# Altium PCB PWR.PcbDoc
Units mm, origin at the board's own origin, x right, y up, seen from the top; angles counter-clockwise.
Board outline 96 x 90 mm, 2 copper layers (Signal, GND); 41 components, 25 nets, 171 pads, 38 vias.
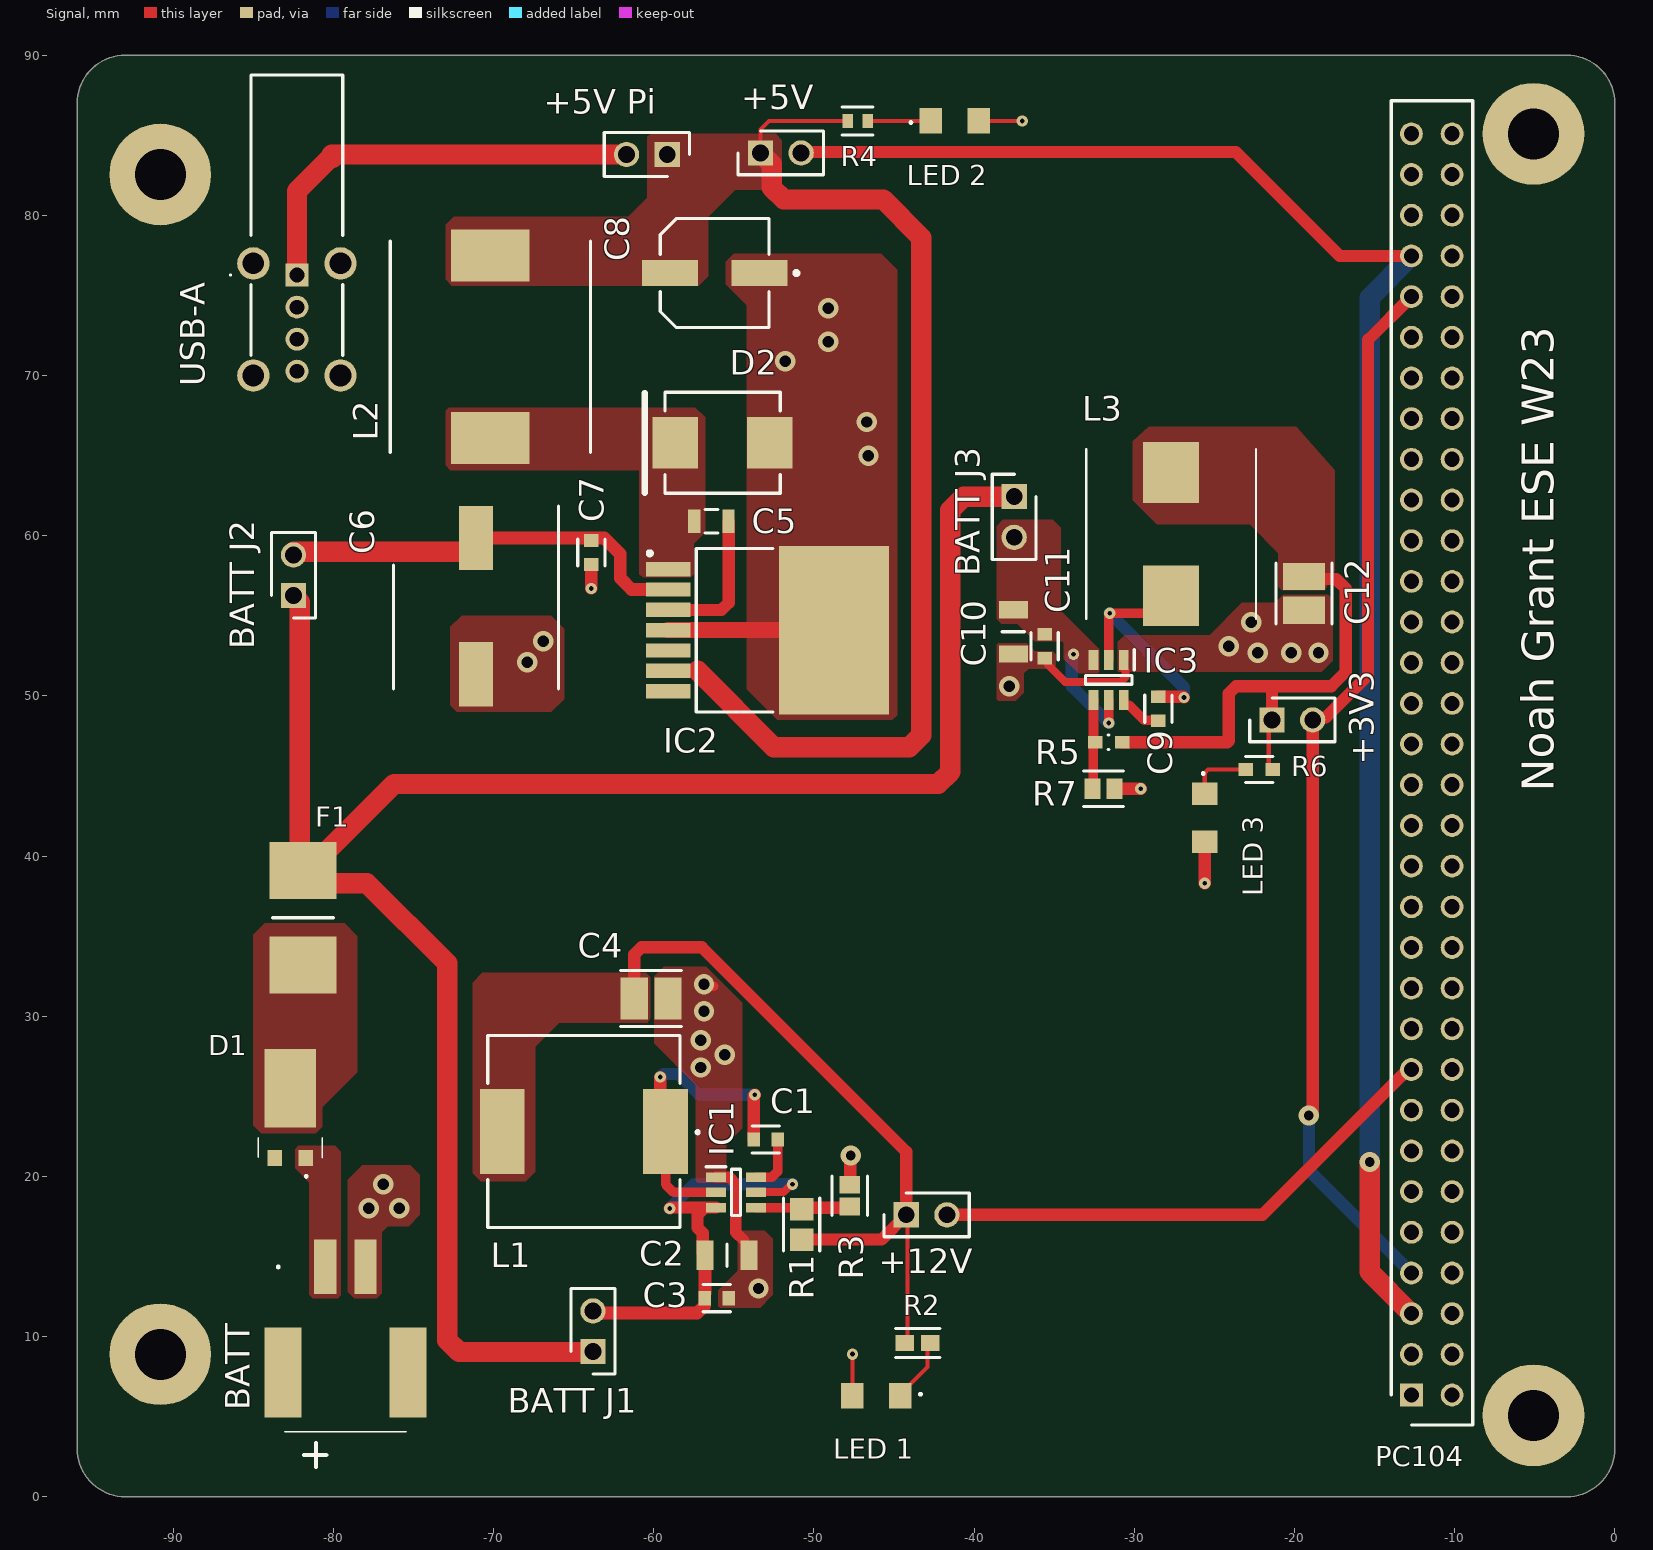
[diagram p0: Signal view]
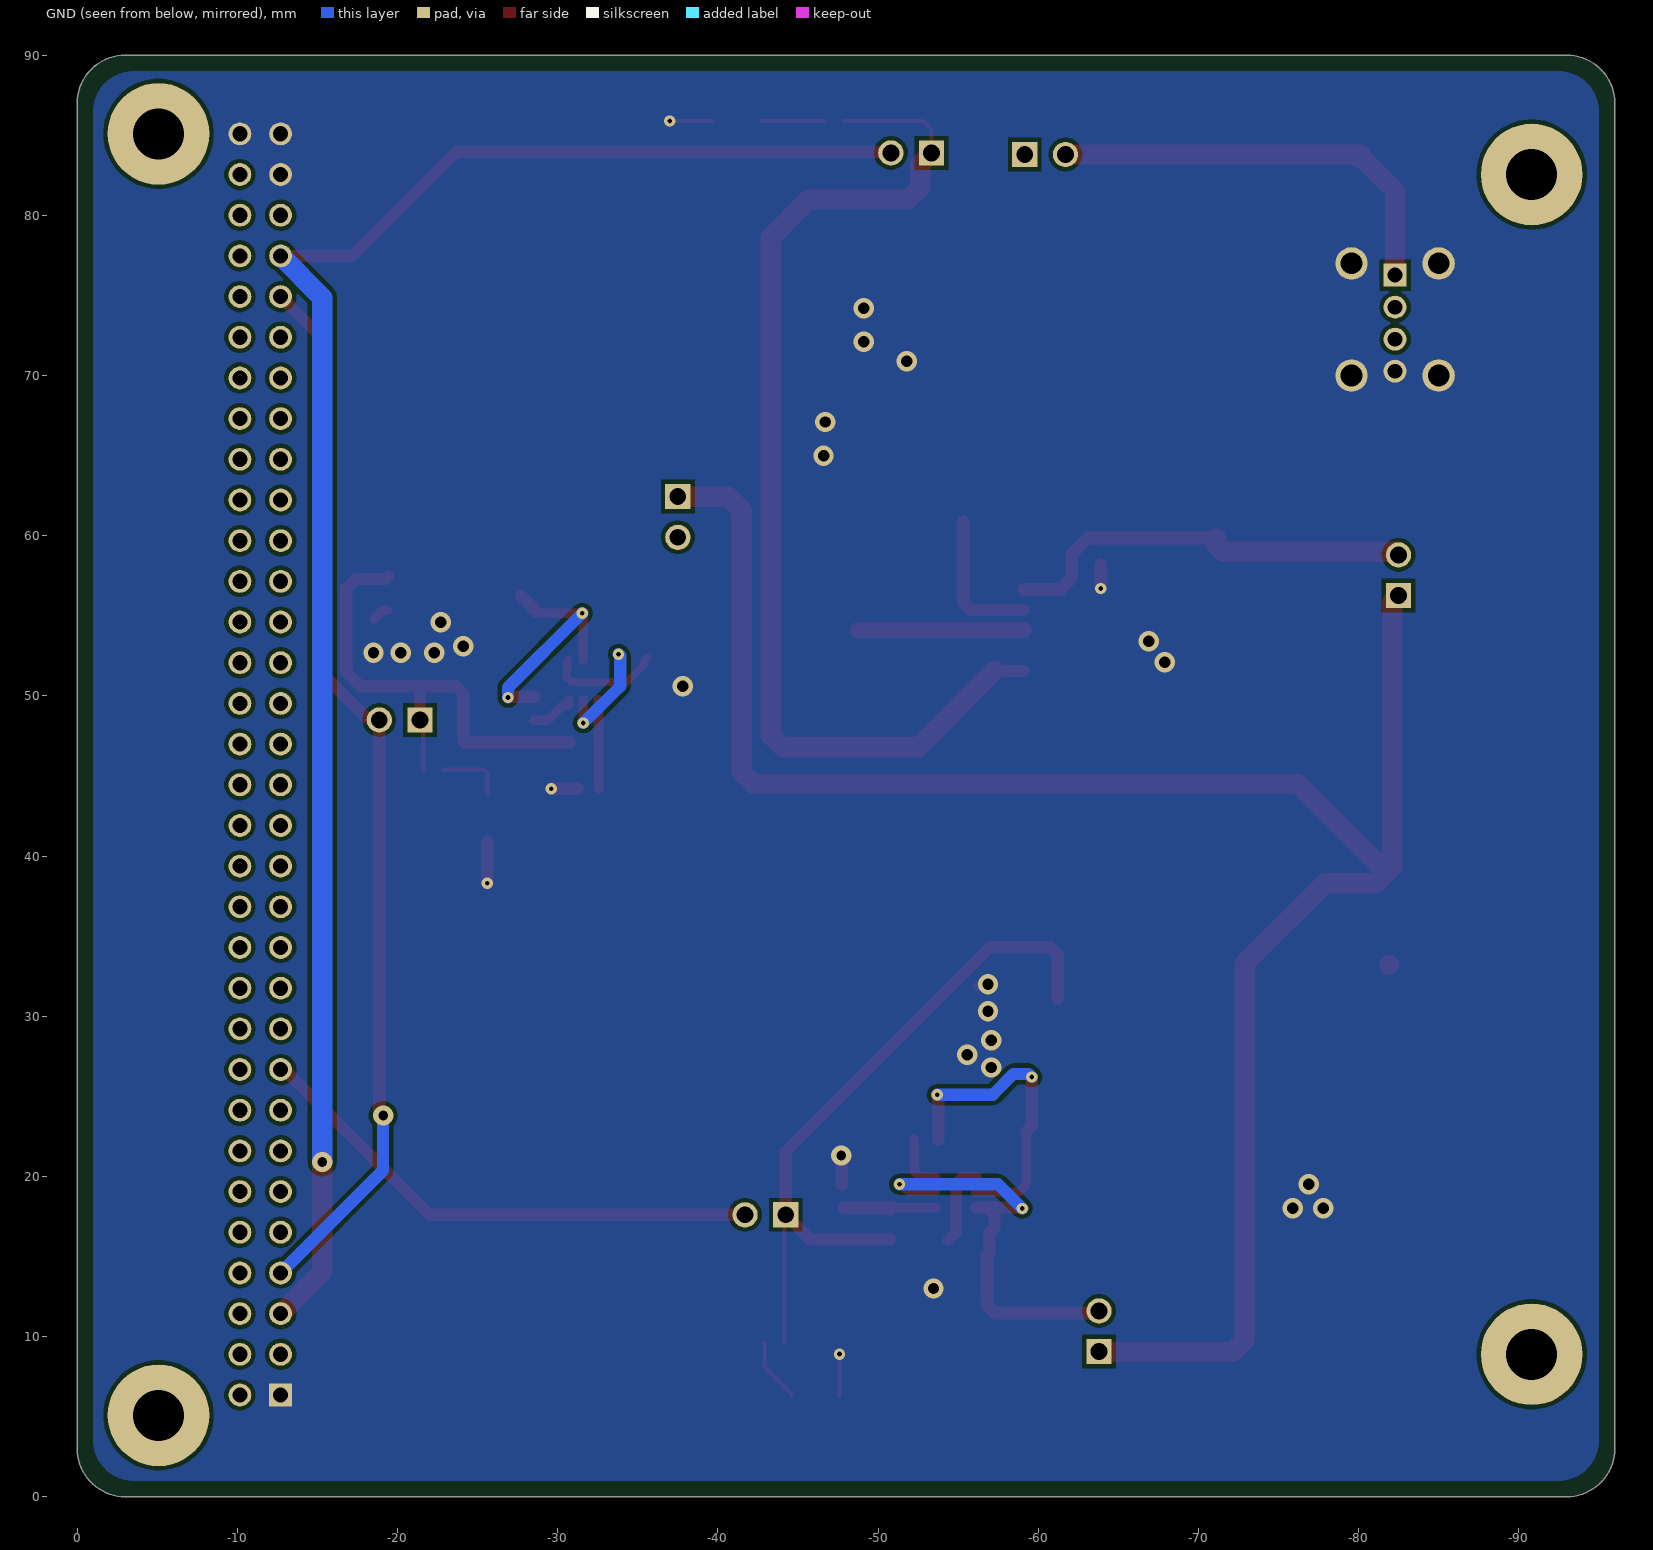
[diagram p1: GND view, seen from below]
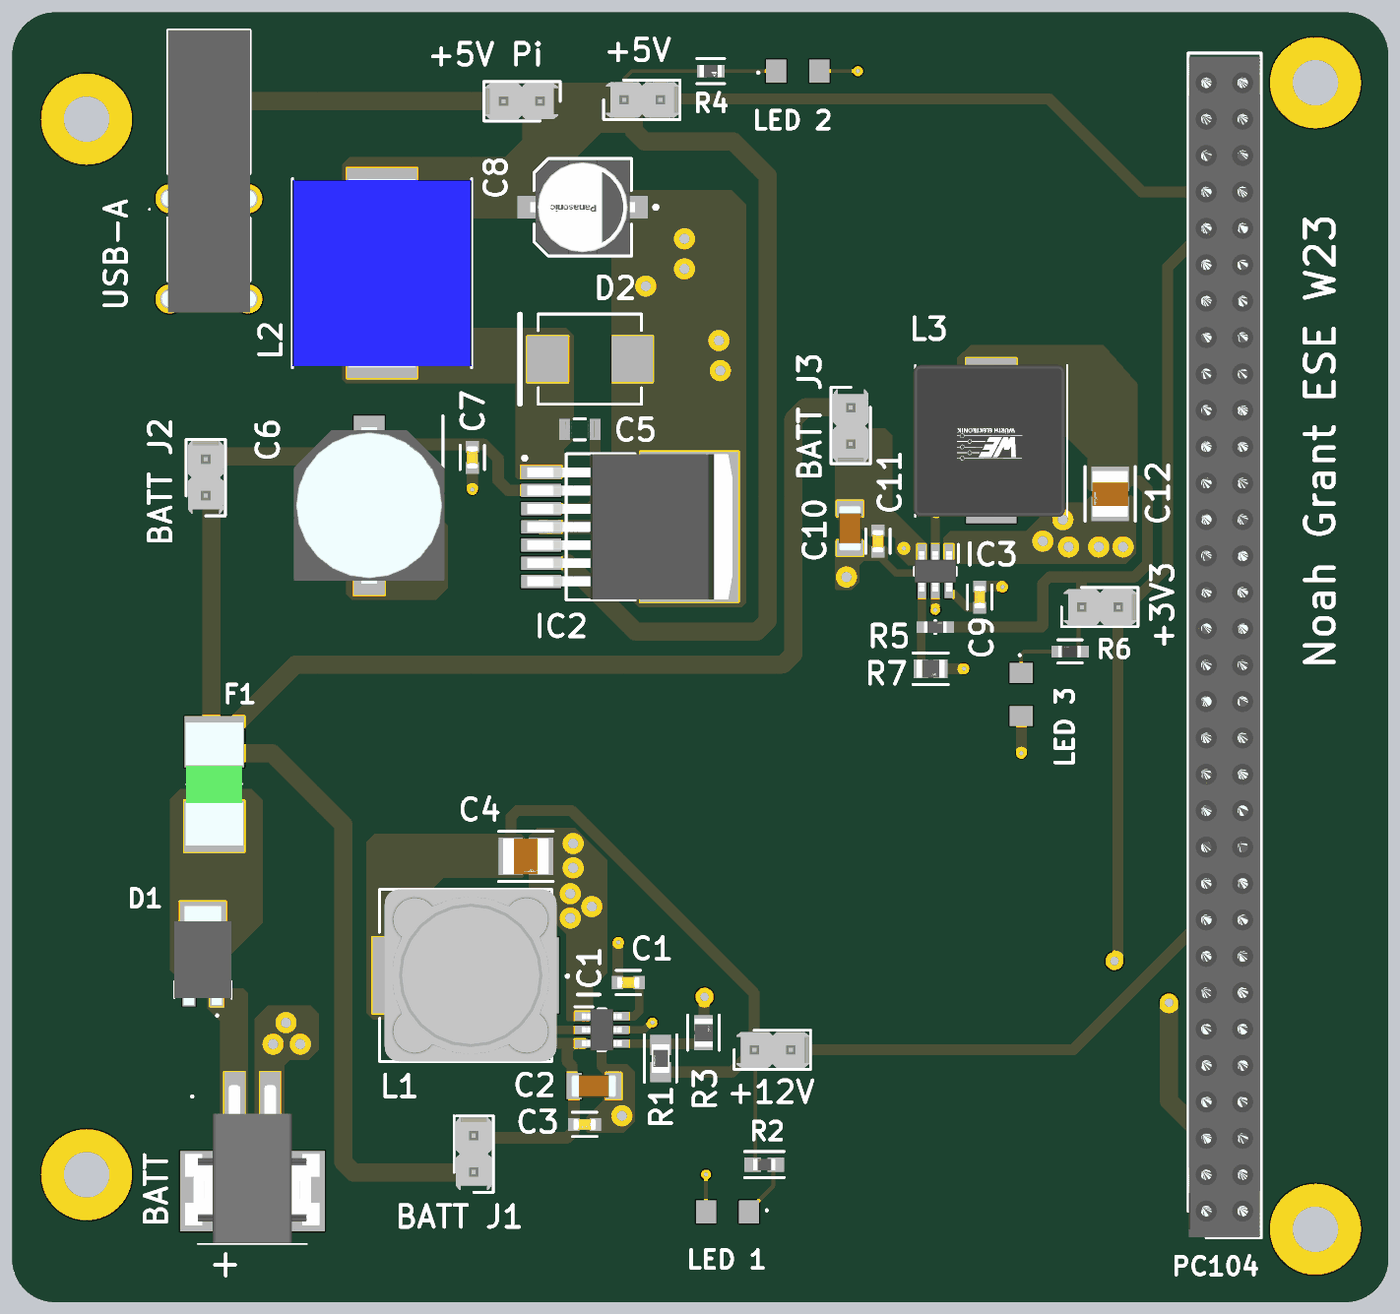
[diagram p2: 3D render of the assembled board from above, using the file's embedded part models]

## Layer stack, top to bottom
Top Solder: solder mask 0.0102, Solder Resist, Dk 3.5
Signal: signal copper 0.035
Dielectric 1: dielectric 0.32, FR-4, Dk 4.8
GND: signal copper 0.035
Bottom Solder: solder mask 0.0102, Solder Resist, Dk 3.5

## Board outline
-93,0 cw(c-93,3) -96,3 -96,87 cw(c-93,87) -93,90 -3,90 cw(c-3,87) 0,87 0,3 cw(c-3,3) -3,0

## Design rules (kind name [scope] priority, off if disabled: settings)
Clearance [All] p1: gap=0.254 ignorepadtopadclearanceinfootprint=FALSE except(0: Arc-Hole Track-Hole SMDPad-Hole THPad-Hole Via-Hole Fill-Hole Poly-Hole Region-Hole Text-Hole)
PolygonConnect [All] p1: connectstyle=Direct reliefconductorwidth=0.254 reliefentries=4 polygonreliefangle="90 Angle" airgapwidth=0.254
RoutingVias [All] p1: holewidth=0.3 width=0.7 viastyle="Through Hole" minholewidth=0.2 minwidth=0.5 maxholewidth=0.6 maxwidth=1.27
SolderMaskExpansion [All] p1: expansion=0.102 istentingtop=FALSE
Width [All] p1: maxlimit=2.79 minlimit=0.254 preferedwidth=0.762 minimp=50.000000 maximp=50.000000 favimp=50.000000
30 further rules are at their usual default settings.

## Classes and differential pairs
component class R-Pi3: USB-A
component class PC104_Connectors: PC104
component class Power: +3V3 +5V "+5V Pi" +12V BATT "BATT J1" "BATT J2" "BATT J3" C1 C2 C3 C4 C5 C6 C7 C8 C9 C10 C11 C12 D2 F1 IC1 IC2 IC3 L1 L2 L3 "LED 1" "LED 2" "LED 3" R1 R2 R3 R4 R5 R6 R7

## Components (designator, comment, footprint, x,y, rotation, side; value= is the part's Value field where it differs from the comment)
+3V3 "0022284023" HDRV2W87P0X254_1X2_508X249X863P -21.4,48.5 r0 top
+5V "0022284023" HDRV2W87P0X254_1X2_508X249X863P -53.34,83.9 r0 top
"+5V Pi" "0022284023" HDRV2W87P0X254_1X2_508X249X863P -59.16,83.8 r180 top
+12V "0022284023" HDRV2W87P0X254_1X2_508X249X863P -44.24,17.6 r0 top
BATT "1702473" 1702473 -79.25,14.35 r0 top
"BATT J1" "0022284023" HDRV2W87P0X254_1X2_508X249X863P -63.8,9.06 r90 top
"BATT J2" "0022284023" HDRV2W87P0X254_1X2_508X249X863P -82.5,56.26 r90 top
"BATT J3" "0022284023" HDRV2W87P0X254_1X2_508X249X863P -37.5,62.44 r270 top
C1 "CC0603KPX7R9BB104" FP-CC0603-DA-MFG -53.015,22.3 r0 top value="100 nF"
C2 "GRM31CR61H225KA88L" CAPC3216X180N -55.425,15.076 r180 top
C3 "CC0603KPX7R9BB104" FP-CC0603-DA-MFG -56.065,12.4 r0 top value="100 nF"
C4 "GRM32ER61C476KE15L" FP-GRM32E-0_3-0_2-IPC_C -60.165,31.1 r0 top
C5 "CGA4C2C0G1H103J060AA" FP-CGA4J-IPC_B -56.4,60.9 r180 top
C6 "50PFV100M10X10.5" CAPAE1030X1050N -71.1,55.6 r270 top
C7 "CC0603KPX7R9BB104" FP-CC0603-DA-MFG -63.9,58.95 r270 top value="100 nF"
C8 "16SVPF180M" FP-OS-CON-SMT-C6-MFG -56.2,76.4 r180 top
C9 "CC0603KPX7R9BB104" FP-CC0603-DA-MFG -28.5,49.2 r270 top value="100 nF"
C10 "GRM31CR61H225KA88L" CAPC3216X180N -37.55,54 r90 top
C11 "CC0603KPX7R9BB104" FP-CC0603-DA-MFG -35.6,53.1 r270 top value="100 nF"
C12 "GRM32ER61C476KE15L" FP-GRM32E-0_3-0_2-IPC_C -19.4,56.4 r270 top
D1 "DST1040S" DST1040SA -82.7,21.15 r270 top
D2 "B560C-13-F" DIOD-B5X0C-2_M -55.7,65.8 r0 top
F1 "TR2_6125FF5-R" FUSC8640X287N -81.9,36.15 r270 top
IC1 "LMR51420XDDCR" SOT95P280X110-6N -54.865,19 r0 top
IC2 "LM2677SX-5.0/NOPB" TO127P1435X464-8N -52.9,54.1 r0 top
IC3 "LMR51420XDDCR" SOT95P280X110-6N -31.6,51 r270 top
L1 "SRR1210-180M" SRR1210 -64.365,22.8 r90 top
L2 "MPX1D1250L220" INDPM132125X500N -70.2,71.8 r270 top
L3 "744325780" WE-HCI_103023 -27.7,60.1 r90 top
"LED 1" "APL3015EC-F01" APL3015ECF01 -46.1,6.3 r180 top
"LED 2" "APL3015EC-F01" APL3015ECF01 -41.2,85.9 r0 top
"LED 3" "APL3015EC-F01" APL3015ECF01 -25.6,42.4 r270 top
PC104 "10153302-32111LF" RHDR64W74P254_2X32_8238X499X1115P -12.7,6.35 r90 top locked
R1 "ERA-6AEB4223V" FP-ERA6A-IPC_A -50.765,17 r270 top
R2 "500R" FP-TFCR0603-IPC_A -43.529,9.6 r0 top
R3 "RNCP0805FTD22K1" FP-RNCP0805-IPC_C#1 -47.765,18.8 r270 top
R4 "150R" FP-MCT0603-IPC_C -47.271,85.9 r0 top
R5 "RC0603FR-07100KL" FP-RC0603-0_55-MFG -31.6,47.1 r0 top
R6 "75R" FP-RT0603-MFG -22.2,45.4 r180 top value=75Ω
R7 "RNCP0805FTD22K1" FP-RNCP0805-IPC_C#2 -31.924,44.2 r180 top
USB-A "73725-11A0RLF" 7372511A0RLF -82.28,76.27 r180 top

## Footprints (in the part's own frame and the unit in brackets; to place one, negate y for a bottom-side part, rotate by r counter-clockwise, add the part's x,y. Pads: shape width x height; smd on the part's side, far side on the other; paste and mask are expansions set on the pad)
1702473 [mm]
  rect 1.4x3.4 smd: 1(-1.25,0) 2(1.25,0)
  rect 2.3x5.6 smd: 3(-3.9,-6.6) 4(3.9,-6.6)
  silkscreen extent -4.25,-10.3 3.8,0.05, body extent -4.7,-10.21 4.7,0.79, height 5.12
7372511A0RLF [mm]
  rect 1.431x1.431 hole 0.92: 1(0,0)
  round 1.431 hole 0.92: 2(0,2) 3(0,4) 4(0,6)
  round 2.025 hole 1.35: MH1(2.72,-0.73) MH2(2.72,6.27) MH3(-2.72,6.27) MH4(-2.72,-0.73)
  silkscreen extent -2.86,-12.49 4.2,5, body extent -3.29,-12.49 3.29,7.21, height 15.93
APL3015ECF01 [mm]
  rect 1.4x1.6 smd: 1(-1.5,0) 2(1.5,0)
  silkscreen extent -2.8,-0.15 -2.7,-0.05
CAPAE1030X1050N [mm]
  rect 4x2.15 smd: 1(-4.25,0) 2(4.25,0)
  silkscreen extent -6.25,-5.15 5.15,5.15, body extent -5.45,-5.25 5.45,5.25, height 10.5
CAPC3216X180N [mm]
  rect 1.07x1.82 smd: 1(-1.38,0) 2(1.38,0)
  silkscreen extent 0,-0.7 0,0.7, body extent -1.6,-0.8 1.6,0.8, height 1.8
DIOD-B5X0C-2_M [mm] "Molded Diode, 2-Leads, Body 7.11x6.22mm, IPC Low Density"
  rect 2.85x3.2 smd: 1(-2.95,0) 2(2.95,0)
  silkscreen extent -4.87,-3.15 3.6,3.15, body extent -3.56,-3.11 3.55,3.11, height 2.63
DST1040SA [mm]
  rect 1x0.9 smd: 1(0,0.97) 2(0,-0.97)
  rect 4.9x3.2 smd: 3(-4.35,0)
  silkscreen extent -1.25,-2 1.2,2, body extent -6.48,-1.99 0.41,1.99, height 1.35
FP-CC0603-DA-MFG [mm]
  rect 0.8x0.9 smd paste+0 mask+0: 1(-0.75,0) 2(0.75,0)
  silkscreen extent -0.85,-0.85 0.85,0.85, body extent -1.35,-0.75 1.35,0.75, height 0.25
FP-CGA4J-IPC_B [mm]
  rect 0.756x1.456 smd paste+0 mask+0: 1(-1.075,0) 2(1.075,0)
  silkscreen extent -0.4,-0.73 0.4,0.73, body extent -1.7,-0.98 1.7,0.98, height 0.25
FP-ERA6A-IPC_A [mm]
  rect 1.405x1.462 smd paste+0 mask+0: 1(-0.951,0) 2(0.951,0)
  silkscreen extent -1.65,-1.13 1.65,1.13, body extent -2.15,-1.23 2.15,1.23, height 0.25
FP-GRM32E-0_3-0_2-IPC_C [mm]
  rect 1.703x2.606 smd paste+0 mask+0: 1(-1.051,0) 2(1.051,0)
  silkscreen extent -1.9,-1.75 1.9,1.75, body extent -2,-1.45 2,1.45, height 0.25
FP-MCT0603-IPC_C [mm]
  rect 0.664x0.862 smd paste+0 mask+0: 1(-0.629,0) 2(0.629,0)
  silkscreen extent -0.96,-0.87 0.96,0.87, body extent -1.06,-0.58 1.06,0.58, height 0.25
FP-OS-CON-SMT-C6-MFG [mm]
  rect 3.5x1.6 smd paste+0 mask+0: 1(-2.8,0) 2(2.8,0)
  silkscreen extent -5.23,-3.4 3.4,3.4, body extent -4.8,-3.65 4.8,3.65, height 0.25
FP-RC0603-0_55-MFG [mm]
  rect 0.9x0.8 smd paste+0 mask+0: 1(-0.85,0) 2(0.85,0)
  silkscreen extent -0.03,-0.45 0.03,0.45, body extent -1.4,-0.55 1.4,0.55, height 0.25
FP-RNCP0805-IPC_C#1 [mm]
  rect 1.105x1.308 smd paste+0 mask+0: 1(-0.676,0) 2(0.676,0)
  silkscreen extent -1.23,-1.1 1.23,1.1, body extent -1.33,-0.8 1.33,0.8, height 0.25
FP-RNCP0805-IPC_C#2 [mm]
  rect 1x1.308 smd paste+0 mask+0: 1(-0.676,0) 2(0.676,0)
  silkscreen extent -1.23,-1.1 1.23,1.1, body extent -1.33,-0.8 1.33,0.8, height 0.25
FP-RT0603-MFG [mm]
  rect 0.9x0.8 smd paste+0 mask+0: 1(-0.85,0) 2(0.85,0)
  silkscreen extent -0.85,-0.81 0.86,0.8, body extent -1.4,-0.55 1.4,0.55, height 0.25
FP-TFCR0603-IPC_A [mm]
  rect 1.158x1.012 smd paste+0 mask+0: 1(-0.802,0) 2(0.802,0)
  silkscreen extent -1.38,-0.91 1.38,0.91, body extent -1.88,-1.01 1.88,1.01, height 0.25
FUSC8640X287N [mm]
  rect 3.57x4.17 smd: 1(-2.95,0) 2(2.95,0)
  silkscreen extent 0,-1.9 0,1.9, body extent -4.3,-2 4.3,2, height 2.87
HDRV2W87P0X254_1X2_508X249X863P [mm]
  rect 1.575x1.575 hole 1.05: 1(0,0)
  round 1.575 hole 1.05: 2(2.54,0)
  silkscreen extent -1.4,-1.37 3.94,1.37, body extent -1.25,-1.24 3.83,1.24, height 8.37
INDPM132125X500N [mm]
  rect 3.25x4.9 smd: 1(-5.7,0) 2(5.7,0)
  silkscreen extent -6.6,-6.25 6.6,6.25, body extent -6.6,-6.25 6.6,6.25, height 5
RHDR64W74P254_2X32_8238X499X1115P [mm]
  rect 1.425x1.425 hole 0.95: 1(0,0)
  round 1.425 hole 0.95: 2(2.54,0) 3(5.08,0) 4(7.62,0) 5(10.16,0) 6(12.7,0) 7(15.24,0) 8(17.78,0) 9(20.32,0) 10(22.86,0) 11(25.4,0) 12(27.94,0) 13(30.48,0) 14(33.02,0) 15(35.56,0) 16(38.1,0) 17(40.64,0) 18(43.18,0) 19(45.72,0) 20(48.26,0) 21(50.8,0) 22(53.34,0) 23(55.88,0) 24(58.42,0) 25(60.96,0) 26(63.5,0) 27(66.04,0) 28(68.58,0) 29(71.12,0) 30(73.66,0) 31(76.2,0) 32(78.74,0) 33(0,-2.54) 34(2.54,-2.54) 35(5.08,-2.54) 36(7.62,-2.54) 37(10.16,-2.54) 38(12.7,-2.54) 39(15.24,-2.54) 40(17.78,-2.54) 41(20.32,-2.54) 42(22.86,-2.54) 43(25.4,-2.54) 44(27.94,-2.54) 45(30.48,-2.54) 46(33.02,-2.54) 47(35.56,-2.54) 48(38.1,-2.54) 49(40.64,-2.54) 50(43.18,-2.54) 51(45.72,-2.54) 52(48.26,-2.54) 53(50.8,-2.54) 54(53.34,-2.54) 55(55.88,-2.54) 56(58.42,-2.54) 57(60.96,-2.54) 58(63.5,-2.54) 59(66.04,-2.54) 60(68.58,-2.54) 61(71.12,-2.54) 62(73.66,-2.54) 63(76.2,-2.54) 64(78.74,-2.54)
  silkscreen extent -1.87,-3.83 80.81,1.26, body extent -1.82,-3.76 80.56,1.22, height 11.15
SOT95P280X110-6N [mm]
  rect 1.25x0.6 smd: 1(-1.25,0.95) 2(-1.25,0) 3(-1.25,-0.95) 4(1.25,-0.95) 5(1.25,0) 6(1.25,0.95)
  silkscreen extent -1.88,-1.45 0.28,1.6, body extent -1.4,-1.45 1.4,1.45, height 0.97
SRR1210 [mm]
  rect 5.3x2.8 smd: 1(0,-5.1) 2(0,5.1)
  silkscreen extent -6,-7.19 6,6, body extent -6,-6.35 6,5.65, height 10
TO127P1435X464-8N [mm]
  rect 2.8x0.9 smd: 1(-6.2,3.81) 2(-6.2,2.54) 3(-6.2,1.27) 4(-6.2,0) 5(-6.2,-1.27) 6(-6.2,-2.54) 7(-6.2,-3.81)
  rect 6.85x10.5 smd: 8(4.15,0)
  silkscreen extent -7.47,-5.1 0.35,5.1, body extent -7.16,-5.08 7.14,5.08, height 4.72
WE-HCI_103023 [mm]
  rect 3.8x3.5 smd: 1(-3.85,0) 2(3.85,0)
  silkscreen extent -5.3,-5.3 5.3,5.3, body extent -5.3,-5.17 5.3,5.43, height 2.81

## Part data
+3V3 +5V "+5V Pi" +12V "BATT J1" "BATT J2" "BATT J3": "Connector", Manufacturer_Name=Molex, Mouser Part Number=N/A, Arrow Part Number=0022284023, Arrow Price/Stock=https://www.arrow.com/en/products/0022284023/molex, Datasheet Link=https://www.molex.com/pdm_docs/sd/022284023_sd.pdf, Height=8.63mm, Manufacturer_Part_Number=0022284023, Mouser Price/Stock=https://www.mouser.co.uk/ProductDetail/Molex/0022284023?qs=PBcRNPEHKsr%2FPE%2F%252B8ije0g%3D%3D
BATT: "Connector", Manufacturer_Name="Phoenix Contact", Mouser Part Number=651-1702473, Arrow Part Number=1702473, Arrow Price/Stock=https://www.arrow.com/en/products/1702473/phoenix-contact?region=nac, Datasheet Link=http://www.phoenixcontact.com/de/produkte/1702473/pdf, Height=5.22mm, Manufacturer_Part_Number=1702473, Mouser Price/Stock=https://www.mouser.co.uk/ProductDetail/Phoenix-Contact/1702473?qs=i0qWf6NAoDu6Kp2LncOlag%3D%3D
C1 C3 C7 C9 C11: library part CMP-03422-000468-1, "CAP CER 0.1UF 50V X7R 0603", Capacitance="100 nF", Manufacturer=YAGEO, Package=CC0603-DA, Temperature="-55°C to +125°C", Temperature Characteristic=X7R, Temperature Coefficient=15%, Temperature Range High=+125°C, Temperature Range Low=-55°C, Tolerance=0.1, Voltage="50 V", Automotive=No, Category=Cap, ComponentLink2Description=Datasheet, ComponentLink2URL=http://www.yageo.com/documents/recent/UPY-GPHC_X7R_6.3V-to-50V_18.pdf, Device Class L1="Passive Components", Device Class L2=Capacitors, Device Class L3="Ceramic Capacitors", Digikey Description="CAP CER 0.1UF 50V X7R 0603", Footprint Url=http://www.yageo.com/exep/pages/download/literatures/UPY-C_GEN_24.pdf, Height=0.9mm, Lead Free=Yes, Manufacturer Part Number=CC0603KPX7R9BB104, Material=Ceramic, Mouser Description="Multilayer Ceramic Capacitors MLCC - SMD/SMT 100nF 50V X7R 10%", Octopart=https://octopart.com/cc0603kpx7r9bb104-yageo-12885113, RoHS=TRUE, Voltage Rating="50 V"
C2 C10: "Capacitor", Capacitance=2.2uF, Manufacturer_Name="Murata Electronics", Mouser Part Number=81-GRM31CR61H225KA8L, Datasheet Link=https://datasheet.datasheetarchive.com/originals/distributors/Datasheets_SAMA/ec4f1577dddcc7a13ddad897a28002d3.pdf, Height=1.8mm, Manufacturer_Part_Number=GRM31CR61H225KA88L, Mouser Price/Stock=https://www.mouser.co.uk/ProductDetail/Murata-Electronics/GRM31CR61H225KA88L?qs=PNuoBeNXpiW6XsFe%2FHBnHw%3D%3D
C4 C12: library part CMP-2000-06362-2, "CAP CER 47UF 16V X5R 1210", Capacitance=47uF, Case Code (Imperial)=1210, Case Code (Metric)=3225, Dielectric=X5R, Max Operating Temperature=85°C, Min Operating Temperature=-55°C, Package Quantity=1, Tolerance=10%, Voltage=16V, Case/Package=1210, Depth=2.5mm, Height=2.5mm, Lead Free="Lead Free", Length=3.2mm, Material=Ceramic, Mount="Surface Mount", Number of Pins=2, Packaging="Cut Tape", Radiation Hardening=No, REACH SVHC="No SVHC", RoHS Compliant=Yes, Termination=SMD/SMT, Thickness=0.106inch, Voltage Rating=16V, Voltage Rating (DC)=16V, Width=0.098inch
C5: library part CMP-08246-000595-1, "Cap Ceramic 10nF 50V C0G 5% Pad SMD 0805 +125°C Automotive T/R", Capacitance=10nF, Case Code (Imperial)=0805, Case Code (Metric)=2012, Dielectric=C0G, Max Operating Temperature=125°C, Min Operating Temperature=-55°C, Package Quantity=1, Ratings=AEC-Q200, Tolerance=5%, Voltage Rating=50V, Case/Package=0805, Composition=Ceramic, Depth=1.25mm, Height=0.6mm, Lead Free="Lead Free", Length=2mm, Mount="Surface Mount", Packaging="Tape and Reel", Radiation Hardening=No, REACH SVHC="No SVHC", Termination=SMD/SMT, Thickness=0.028inch, Voltage Rating (DC)=50V, Weight=0.000194oz, Width=0.049inch
C6: "Capacitor Polarised", Capacitance=100uF, Manufacturer_Name=Rubycon, Mouser Part Number=232-50PFV100M10X10.5, Arrow Part Number=50PFV100M10X10.5, Arrow Price/Stock=https://www.arrow.com/en/products/50pfv100m10x10.5/rubycon?region=nac, Datasheet Link=https://www.mouser.jp/datasheet/2/977/e_PFV-1600672.pdf, Height=10.5mm, Manufacturer_Part_Number=50PFV100M10X10.5, Mouser Price/Stock=https://www.mouser.co.uk/ProductDetail/Rubycon/50PFV100M10X10.5?qs=T3oQrply3y%252BvhjwV%252B%252Bv4tQ%3D%3D
C8: library part CMP-05428-001090-1, "Conductive Polymer Aluminum Solid Capacitors (OS-CON) 180uF ±20% 16V", Capacitance=180uF, Case/Package=Radial, ESR (Equivalent Series Resistance)=22mR, Leakage Current=576uA, Max Operating Temperature=105°C, Min Operating Temperature=-55°C, Package Quantity=1, Ripple Current=3.3A, Tolerance=20%, Voltage=16V, Construction=Cylindrical, Diameter=6.3mm, Dissipation Factor=12%, Height=5.9mm, Height - Seated (Max)=0.236inch, Lead Free="Lead Free", Length=5.9mm, Life (Hours)=5000Hour, Mount="Surface Mount", Number of Pins=6, Packaging="Tape and Reel", Polarity=Polar, Radiation Hardening=No, REACH SVHC="No SVHC", Ripple Current (AC)=3.3A, RoHS Compliant=Yes, Series="OS-CON™, SVPF", Termination=SMD/SMT, Voltage Rating=16V, Voltage Rating (DC)=16V
D1: "Schottky Diode", Manufacturer_Name=LITTELFUSE, Mouser Part Number=576-DST1040S, Arrow Part Number=DST1040S, Arrow Price/Stock=https://www.arrow.com/en/products/dst1040s/littelfuse, Datasheet Link=https://m.littelfuse.com/~/media/electronics/datasheets/power_semiconductors/littelfuse_power_semiconductor_schottky_diode_dst1040s_datasheet.pdf.pdf, Height=1.25mm, Manufacturer_Part_Number=DST1040S, Mouser Price/Stock=https://www.mouser.co.uk/ProductDetail/Littelfuse/DST1040S?qs=%252BC9Bk%2FBEkFwEQIZlBedqnA%3D%3D
D2: library part CMP-2000-05098-2, "Schottky Barrier Rectifier, 5 A, 60 V, -55 to 125 degC, 2-Pin SMD, RoHS, Tape and Reel", If - Forward Current=5A, Ifsm - Forward Surge Current=100A, Ir - Reverse Current=500uA, Manufacturer=DiodesIncorporated, Maximum Operating Temperature=+125C, Minimum Operating Temperature=-55C, Operating Temperature Range=-55Cto+125C, Package / Case=SMC, Vf - Forward Voltage=0.7V, Vrrm - Repetitive Reverse Voltage=60V, Brand=DiodesIncorporated, Configuration=Single, Datasheet URL=https://datasheet.ciiva.com/27052/1538961-27052355.pdf, Datasheet Version="Rev. 7-2, 06/2007", Factory Pack Quantity=3000, Height=2.5mm, Length=7.11mm, Manufacturer URL=http://www.diodes.com/, Mounting Style=SMD/SMT, Packaging=Reel, Product=SchottkyDiodes, Product Category=SchottkyDiodes&Rectifiers, RoHS=True, Series=B560, Technology=Si, Termination Style=SMD/SMT, Type=SchottkyBarrierRectifier, Unit Weight=0.007408oz, Width=6.22mm
F1: "Fuse", Manufacturer_Name=Eaton, Manufacturer_Part_Number=TR2/6125FF5-R, Datasheet Link=https://ms.componentsearchengine.com/Datasheets/2/TR2_6125FF5-R.pdf, Height=2.87mm
IC1 IC3: "Integrated Circuit", Manufacturer_Name="Texas Instruments", Mouser Part Number=595-LMR51420XDDCR, Datasheet Link=https://www.ti.com/lit/ds/symlink/lmr51420.pdf?ts=1663231243064, Height=1.1mm, Manufacturer_Part_Number=LMR51420XDDCR, Mouser Price/Stock=https://www.mouser.co.uk/ProductDetail/Texas-Instruments/LMR51420XDDCR?qs=vvQtp7zwQdN6fBqQU4azxw%3D%3D
IC2: library part LM2677S-ADJ_NOPB, "Integrated Circuit", Arrow Part Number=LM2677S-ADJ/NOPB, Manufacturer_Name="Texas Instruments", Mouser Part Number=926-LM2677S-ADJ/NOPB, Arrow Price/Stock=https://www.arrow.com/en/products/lm2677s-adjnopb/texas-instruments, Datasheet Link=http://www.ti.com/lit/ds/symlink/lm2677.pdf, Height=4.64mm, Manufacturer_Part_Number=LM2677S-ADJ/NOPB, Mouser Price/Stock=https://www.mouser.co.uk/ProductDetail/Texas-Instruments/LM2677S-ADJ-NOPB?qs=X1J7HmVL2ZFcqPykAfO2og%3D%3D
L1: "Inductor", Inductance=18uH, Manufacturer_Name=Bourns, Mouser Part Number=652-SRR1210-180M, Arrow Part Number=SRR1210-180M, Arrow Price/Stock=https://www.arrow.com/en/products/srr1210-180m/bourns, Datasheet Link=https://www.bourns.com/pdfs/SRR1210.pdf, Manufacturer_Part_Number=SRR1210-180M, Mouser Price/Stock=https://www.mouser.co.uk/ProductDetail/Bourns/SRR1210-180M?qs=4vvWAaIu%2Fq5trcUyNP0dXQ%3D%3D
L2: "Inductor", Inductance=22uH, Manufacturer_Name=KEMET, Datasheet Link=https://content.kemet.com/datasheets/KEM_L9012_MPX.pdf, Height=5mm, Manufacturer_Part_Number=MPX1D1250L220
L3: "Inductor", Inductance=7.8uH, Manufacturer_Name="Wurth Elektronik", Mouser Part Number=710-744325780, Manufacturer_Part_Number=744325780, Mouser Price/Stock=https://www.mouser.co.uk/ProductDetail/Wurth-Elektronik/744325780?qs=VxkwJfKV0FQ2%2FeCS8beGcw%3D%3D
"LED 1" "LED 2" "LED 3": "LED", Manufacturer_Name=Kingbright, Mouser Part Number=604-APL3015EC-F01, Datasheet Link=https://componentsearchengine.com/Datasheets/1/APL3015EC-F01.pdf, Manufacturer_Part_Number=APL3015EC-F01, Mouser Price/Stock=https://www.mouser.co.uk/ProductDetail/Kingbright/APL3015EC-F01?qs=VdjlWU%2FzoOF91deOgS6C3g%3D%3D
PC104 USB-A: "Connector", Manufacturer_Name="Amphenol Communication Solutions"
  PC104: Datasheet Link=https://cdn.amphenol-cs.com/media/wysiwyg/files/drawing/10153302.pdf, Height=11.15mm, Manufacturer_Part_Number=10153302-32111LF
  USB-A: Arrow Part Number=73725-11A0RLF, Arrow Price/Stock=https://www.arrow.com/en/products/73725-11a0rlf/amphenol-fci?region=europe, Datasheet Link=https://cdn.amphenol-cs.com/media/wysiwyg/files/drawing/73725.pdf, Height=15.83mm, Manufacturer_Part_Number=73725-11A0RLF
R1: library part CMP-2001-00824-3, "RES 422K OHM 0.1% 1/8W 0805", Case Code (Imperial)=0805, Case Code (Metric)=2012, Max Operating Temperature=155°C, Max Power Dissipation=125mW, Min Operating Temperature=-55°C, Package Quantity=5000, Ratings=AEC-Q200, Resistance=422kR, Resistance Tolerance=0.1%, Resistor Type="Thin Film", Temperature Coefficient=25ppm/°C, Voltage Rating=100V, Case/Package=0805, Construction=Rectangular, Contact Plating=Tin, Depth=1.25mm, Features="Automotive AEC-Q200", Height=0.5mm, Lead Free="Lead Free", Length=2mm, Military Standard=Not, Mount="Surface Mount", Number of Pins=2, Number of Terminations=2, Packaging="Tape and Reel", Power Rating=125mW, Radiation Hardening=No, Reach SVHC Compliant=Yes, Series=ERA-6A, Technology="METAL FILM", Termination=Solder, Tolerance=0.1%, Voltage Rating (DC)=100V, Width=1.25mm
R2: library part CMP-250906-063952-1, "RES Thin Film,  500Ω, 0.1%, 0.1W, 25ppm/°C, 0603", RoHS Compliant=Yes
R3 R7: library part CMP-26527-000518-1, "22.1kΩ ±1% 0.25W 0805 High Power Anti-Sulfur Thin Film Chip Resistor", Case Code (Imperial)=0805, Case Code (Metric)=2012, Max Operating Temperature=155°C, Max Power Dissipation=250mW, Min Operating Temperature=-55°C, Resistance=22.1kR, Resistor Type="Thin Film", Temperature Coefficient=100ppm/°C, Tolerance=1%, Case/Package=0805, Features="Moisture Resistant", Height=0.024inch, Length=0.079inch, Mount="Surface Mount", Number of Terminations=2, Packaging="Tape and Reel", RoHS Compliant=Yes, Series=RNCP, Width=0.049inch
R4: library part CMP-02407-011712-1, "RES SMD 150 OHM 1% 1/8W 0603", Case Code (Imperial)=0603, Case Code (Metric)=1608, Max Operating Temperature=175°C, Max Power Dissipation=150mW, Min Operating Temperature=-55°C, Package Quantity=1, Power Rating=125mW, Resistance Tolerance=0.5%, Resistor Type="Thin Film", Temperature Coefficient=25ppm/°C, Voltage Rating=75V, Case/Package=0603, Construction=Rectangular, Depth=0.85mm, Features="Automotive AEC-Q200", Height=0.022inch, Length=0.061inch, Military Standard=Not, Number of Pins=2, Number of Terminations=2, Packaging="Tape and Reel", REACH SVHC="No SVHC", Resistance=150R, RoHS Compliant=Yes, Series="MCT 0603 - Professional", Termination=SMD/SMT, Tolerance=0.5%, Voltage Rating (DC)=75V, Width=0.8mm
R5: library part CMP-2100-03662-2, "RES SMD 100K OHM 1% 1/10W 0603", Case Code (Imperial)=0603, Case Code (Metric)=1608, Max Operating Temperature=155°C, Max Power Dissipation=100mW, Min Operating Temperature=-55°C, Resistance=100kR, Resistance Tolerance=1%, Resistor Type="Thick Film", Temperature Coefficient=100ppm/°C, Voltage Rating=50V, Working Voltage=75V, Case/Package=0603, Construction=Rectangular, Depth=0.8mm, Features="Moisture Resistant", Height=0.45mm, Lead Free="Lead Free", Length=1.6mm, Military Standard=Not, Number of Pins=2, Number of Terminations=2, Packaging="Tape and Reel", Power Rating=100mW, REACH SVHC="No SVHC", RoHS Compliant=Yes, Series=RC, Technology="THICK FILM", Termination=SMD/SMT, Tolerance=1%, Voltage Rating (DC)=50V, Width=0.8mm
R6: library part CMP-2000-04797-2, "RES SMD 75 OHM 1% 1/10W 0603", Manufacturer=Yageo, Manufacturer Part Number=RT0603FRE0775RL, Package=RT0603, Power Rating=0.1W, Resistance=75Ω, Temperature="-55°C to +155°C", Temperature Coefficient="50 ppm/°C", Temperature Range High=+155°C, Temperature Range Low=-55°C, Tolerance=0.01, Voltage Rating=75V, Automotive=No, Category=Res, ComponentLink2Description=Datasheet, ComponentLink2URL=http://www.yageo.com/documents/recent/PYu-RT_1-to-0.01_RoHS_L_9.pdf, Composition="Thin Film", Device Class L1="Passive Components", Device Class L2=Resistors, Device Class L3="Chip SMD Resistors", Digikey Description="RES SMD 75 OHM 1% 1/10W 0603", Footprint Url=http://www.yageo.com/exep/pages/download/literatures/PYu-R_Mount_10.pdf, Height=0.55mm, Ipc Land Pattern Name=RESC16080X45, Lead Free=Yes, Mouser Description="Res Thin Film 0603 75 Ohm 1% 1/10W ±50ppm/°C Molded SMD SMD Paper T/R", Octopart=https://octopart.com/rt0603fre0775rl-yageo-1163751, RoHS=TRUE, Series=RT

## Free pads (board coordinates)
  round 6.35 hole 3.18 unplated: 1(-90.81,8.89) 1(-90.81,82.55) 1(-5.08,5.08) 1(-5.08,85.09)

## Via types
v1: diameter 1.27, hole 0.711, Signal to GND, 22 vias
v2: diameter 0.7, hole 0.3, Signal to GND, 13 vias
v3: diameter 1.27, hole 0.6, Signal to GND, 3 vias

## Nets (pads, with @x,y where several pads share a name; then routed paths per layer and width w, separated by ;. In a path a pad name is that pad's centre, name@x,y a point inside that pad or via, vN(x,y) a via of type N, cw(c..) or ccw(c..) an arc to the next point about the centre after c; other vN are vias at no path point)
+3V3: +3V3.2 PC104.4 PC104.28 | length 66.6
  Signal w0.762: v3(-19.1,23.8) -18.86,24.04 +3V3.2 -18.704,48.656 -18.044,48.656 -15.4,51.3 -15.4,72.23 PC104.28
  GND w0.762: v3(-19.1,23.8) -19.1,20.37 PC104.4
+5V: +5V.2 PC104.3 PC104.29 | length 109
  Signal w0.762: +5V.2 -50.74,83.96 -23.66,83.96 -17.17,77.47 PC104.29
  Signal w1.27: v3(-15.3,20.9) -15.3,14.03 PC104.3
  GND w1.27: v3(-15.3,20.9) -15.3,74.87 PC104.29
"+5V Pi": "+5V Pi.2" USB-A.1 | length 26.8
  Signal w1.27: USB-A.1 -82.28,81.515 -80.195,83.6 -80.036,83.6 ; -80.116,83.8 -61.7,83.8
+12V: +12V.2 PC104.9 | length 32.8
  Signal w0.762: +12V.2 -22,17.6 -13.262,26.338 -13.211,26.338 -12.879,26.67 PC104.9
BATT: "BATT J1.1" "BATT J2.1" "BATT J3.1" F1.1 | length 125.4
  Signal w1.27: -82.5,56.26 -82.1,55.86 -82.1,39.3 F1.1 ; -63.826,9.034 -72.156,9.034 -72.9,9.778 -72.9,33.3 -77.91,38.31 -81.11,38.31 F1.1 ; -37.5,62.44 -40.66,62.44 -41.5,61.6 -41.5,45.244 -42.244,44.5 -76.2,44.5 -81.6,39.1 F1.1
GND: "LED 1.2" "LED 2.2" "LED 3.2" BATT.2 C2.1 C3.2 C4.2 C6.2 C7.2 C8.1 C10.1 C11.2 C12.2 D2.2 IC1.1 IC2.4 IC2.8 IC3.1 PC104.1 PC104.31 PC104.32 PC104.64 R3.1 R7.1 USB-A.4 USB-A.MH1 USB-A.MH2 USB-A.MH3 USB-A.MH4 | length 37.3
  Signal w0.254: -47.6,6.3 v2(-47.6,8.9) ; -39.7,85.9 v2(-37,85.9)
  Signal w0.5: C11.2 -35.55,52.35 -35.4,52.2 -35.4,51.95 -34.329,50.879 -33.059,50.879 -32.041,50.879 -30.85,50.879 -30.558,51.172 -30.558,51.586 -30.6,51.629 -30.6,52.2 IC3.1
  Signal w0.6: v1(-56.865,32) -56.737,31.872 v1@-56.272,31.872 ; C12.2 -19.1,55.349 C12.2@-18.549,54.798
  Signal w0.7: IC1.1 -55.286,19.95 -54.886,19.55 -54.886,16.51 -54.377,16
  Signal w0.762: v2(-63.9,56.7) C7.2 ; IC2.4@-59.169,54.169 IC2.4 ; R3.1 -47.733,19.509 -47.733,21.267 v3(-47.7,21.3) ; R7.1 v2(-29.6,44.2) ; v2(-25.6,38.3) -25.6,40.9
  Signal w1: IC2.4 IC2.8
  other v1: -53.465,13 -77.8,18 -75.9,18 -76.9,19.5 -57.065,26.8 -55.565,27.6 -57.065,28.5 -56.865,30.3 -37.8,50.6 -67.9,52.1 -22.3,52.7 -20.2,52.7 -18.5,52.7 -24.1,53.1 -66.9,53.4 -22.7,54.6 -46.6,65 -46.7,67.1 -51.8,70.9 -49.1,72.1 -49.1,74.2
Net+3V3_1: +3V3.1 C12.1 L3.2 R5.2 R6.1 | length 30.9
  Signal w0.254: R6.1@-21.571,45.4 -21.605,45.434 -21.605,48.295 +3V3.1
  Signal w0.762: R5.2 -24.2,47.1 -24.1,47.2 -24.1,50.154 -23.654,50.6 -21.4,50.6 ; +3V3.1 -21.4,50.6 ; C12.1 -19.25,57.3 -17.4,57.3 -16.8,56.7 -16.8,51.5 -17.7,50.6 -21.4,50.6
"Net+5V Pi_1": "+5V Pi.1" +5V.1 C8.2 IC2.6 L2.1 R4.1 | length 69.4
  Signal w0.254: +5V.1 -53.34,85.36 -52.8,85.9 R4.1
  Signal w0.762: IC2.6 -57.263,51.56
  Signal w1.27: -57.263,51.56 -52.503,46.8 -44.044,46.8 -43.3,47.544 -43.3,78.611 -45.682,80.993 -51.887,80.993 -52.631,81.737 -52.631,83.191 +5V.1
Net+12V_1: +12V.1 C4.1 L1.2 R1.2 R2.1 | length 43.4
  Signal w0.254: +12V.1 -44.159,17.519 R2.1@-44.159,9.6
  Signal w0.762: C4.1 -61.216,33.854 -60.77,34.3 -57,34.3 -44.24,21.54 -44.24,18.525 ; R1.2 -45.791,16.049 +12V.1
"NetBATT J1_2": "BATT J1.2" C2.2 C3.1 IC1.3 IC1.5 | length 27.8
  Signal w0.3: IC1.3 IC1.3@-55.965,18.2 ; v2@-51.449,19.325 -51.338,19.436 v2(-51.338,19.511)
  Signal w0.5: IC1.5@-53.606,19.009 -51.894,19.009 -51.43,19.473 v2@-51.376,19.418
  Signal w0.762: v2(-59,18) -58.95,18.05 -56.826,18.05 ; C2.2 -56.947,15.217 -56.947,16.471 -57.272,16.796 -57.272,17.604 -56.826,18.05 ; IC1.3 -56.826,18.05
  Signal w0.8: -63.8,11.6 -63.666,11.466 -57.284,11.466 -56.815,11.934 C3.1 ; C3.1@-56.815,12.41 -56.815,12.684 -56.805,12.694 C2.2@-56.805,15.054
  GND w0.762: v2(-59,18) -57.489,19.511 v2(-51.338,19.511)
"NetBATT J2_2": "BATT J2.2" C6.1 C7.1 IC2.2 | length 26.2
  Signal w0.8: C6.1 -63.9,59.85 -63.094,59.85 -62.1,58.856 -62.1,57.351 -61.389,56.64 IC2.2
  Signal w1.27: -82.5,59 -71.54,59 -71.1,59.44 C6.1
"NetBATT J3_2": "BATT J3.2" C10.2 C11.1 IC3.3 IC3.5 | length 7
  Signal w0.254: IC3.5@-31.773,49.923 IC3.5
  Signal w0.6: v2(-31.6,48.3) IC3.5
  GND w0.762: v2(-33.8,52.6) -33.9,52.5 -33.9,50.6 v2(-31.6,48.3)
NetBATT_1: BATT.1 D1.1
NetC1_1: C1.1 IC1.2 L1.1 | length 19.5
  Signal w0.6: L1.1 -59.265,19.5 -58.765,19 IC1.2
  Signal w0.762: v2(-59.6,26.2) -59.6,23.135 L1.1 ; C1.1 -53.765,25.035 v2(-53.7,25.1)
  GND w0.762: v2(-59.6,26.2) -59.4,26.4 -58.461,26.4 -57.161,25.1 v2(-53.7,25.1)
NetC1_2: C1.2 IC1.6 | length 3.5
  Signal w0.6: IC1.6 -52.617,19.95 -52.265,20.301 C1.2
NetC5_1: C5.1 IC2.3 | length 9
  Signal w0.762: IC2.3 -55.771,55.37 -55.325,55.816 C5.1
NetC5_2: C5.2 D2.1 IC2.1 L2.2
NetC9_1: C9.1 IC3.2 L3.1 | length 16.1
  Signal w0.6: IC3.2@-31.6,52.255 -31.6,55.062 -31.53,55.133 v2(-31.53,55.16) -28.64,55.16 L3.1@-28.425,55.375
  Signal w0.762: C9.1@-28.55,49.95 C9.1 -26.95,49.95 v2(-26.9,49.9) ; L3.1@-28.5,55.45 L3.1
  GND w0.762: v2(-31.53,55.16) -26.9,50.53 v2(-26.9,49.9)
NetC9_2: C9.2 IC3.6 | length 2.9
  Signal w0.6: IC3.6 -30.65,49.425 -30.325,49.425 -29.386,48.486 -28.536,48.486 C9.2
NetD1_3: D1.3 F1.2 | length 0
  Signal w1.27: F1.2@-81.908,33.192 F1.2
NetIC1_4: IC1.4 R1.1 R3.2 | length 5.8
  Signal w0.6: IC1.4 R1.1@-50.865,18.05
  Signal w0.762: R1.1@-50.865,18.05 R1.1 -50.679,18.037 R3.2@-47.852,18.037
NetIC3_4: IC3.4 R5.1 R7.2 | length 5.4
  Signal w0.6: R7.2 -32.575,44.225 -32.575,47.075 R5.1@-32.55,47.1 ; R5.1@-32.55,47.25 IC3.4
"NetLED 1_1": "LED 1.1" R2.2 | length 4
  Signal w0.254: -44.6,6.3 -44.6,6.4 -42.9,8.1 R2.2@-42.9,9.6
"NetLED 2_1": "LED 2.1" R4.2 | length 3.9
  Signal w0.254: R4.2 -42.7,85.9
"NetLED 3_1": "LED 3.1" R6.2 | length 4.2
  Signal w0.254: -25.6,43.9 -25.6,45.2 -25.4,45.4 R6.2@-22.829,45.4
pads on no net: BATT.3 BATT.4 D1.2 IC2.5 IC2.7 PC104.2 PC104.5 PC104.6 PC104.7 PC104.8 PC104.10 PC104.11 PC104.12 PC104.13 PC104.14 PC104.15 PC104.16 PC104.17 PC104.18 PC104.19 PC104.20 PC104.21 PC104.22 PC104.23 PC104.24 PC104.25 PC104.26 PC104.27 PC104.30 PC104.33 PC104.34 PC104.35 PC104.36 PC104.37 PC104.38 PC104.39 PC104.40 PC104.41 PC104.42 PC104.43 PC104.44 PC104.45 PC104.46 PC104.47 PC104.48 PC104.49 PC104.50 PC104.51 PC104.52 PC104.53 PC104.54 PC104.55 PC104.56 PC104.57 PC104.58 PC104.59 PC104.60 PC104.61 PC104.62 PC104.63 USB-A.2 USB-A.3

## Polygon pours and split planes (outlines as drawn)
NetD1_3 on Signal "NETD1_3_L01_P049" (solid, pour order 49): -81.1,22.7 -84.5,22.7 -85,23.2 -85,35.1 -84.3,35.8 -79.3,35.8 -78.5,35 -78.5,26.5 -80.7,24.3 -80.7,23.1 -80.7,24.3 -80.7,23.1
NetBATT_1 on Signal "NETBATT_1_L01_P048" (solid, pour order 48): -79.7,12.4 -79.53,12.57 -79.53,21.53 -79.9,21.9 -82.2,21.9 -82.4,21.7 -82.4,20.5 -81.5,19.6 -81.5,12.6 -81.3,12.4
GND on Signal "GND_L01_P018" (solid, pour order 18): -55.865,11.8 -55.965,11.9 -55.965,12.9 -54.765,14.1 -54.765,16.3 -54.465,16.6 -53.065,16.6 -52.565,16.1 -52.565,12.6 -52.665,12.5 -53.365,11.8
GND on Signal "GND_L01_P020" (solid, pour order 20): -55.465,19.6 -57.265,19.6 -57.365,19.7 -57.365,25.7 -59.965,28.3 -59.965,32.5 -59.365,33.1 -54.465,33.1 -54.465,23 -55.465,22
"NetBATT J3_2" on Signal "NETBATT_J3_2_L01_P046" (solid, pour order 46): -32.2,51.482 -32.282,51.4 -33.5,51.4 -34.4,52.3 -34.4,53.3 -34.5,53.4 -36.2,53.4 -37.3,54.5 -38.3,54.5 -38.6,54.8 -38.6,60.6 -38.2,61 -35.1,61 -34.6,60.5 -34.6,55.3 -32.2,52.9
GND on Signal "GND_L01_P047" (solid, pour order 47): -38.6,53.2 -38.5,53.3 -36.7,53.3 -36.2,52.8 -35.1,52.8 -34.9,52.6 -34.9,51.9 -35.1,51.7 -36.6,51.7 -36.9,51.4 -36.9,50.2 -37.4,49.7 -38.5,49.7 -38.6,49.8
GND on Signal "GND_L01_P043" (solid, pour order 43): -72.7,49.4 -72.3,49 -66.4,49 -65.6,49.8 -65.6,54.2 -66.4,55 -72,55 -72.7,54.3
GND on Signal "GND_L01_P042" (solid, remove dead copper, pour order 42): -55.5,77.1 -55,77.6 -45.8,77.6 -44.8,76.6 -44.8,48.8 -45.1,48.5 -52.3,48.5 -54.2,50.4 -54.2,74.4 -55.5,75.7
Net+12V_1 on Signal "NET+12V_1_L01_P041" (solid, pour order 41): -71.3,20.2 -70.8,19.7 -68,19.7 -67.4,20.3 -67.4,28.1 -65.9,29.6 -60.4,29.6 -60.2,29.9 -60.2,30 -60.2,32.4 -60.5,32.7 -70.7,32.7 -71.3,32.1
NetC5_2 on Signal "NETC5_2_L01_P040" (solid, remove dead copper, pour order 40): -72.8,68 -73,67.8 -73,64.4 -72.7,64.1 -60.9,64.1 -60.9,57.6 -60.7,57.4 -57.7,57.4 -57.5,57.6 -57.5,59.5 -56.8,60.2 -56.8,67.4 -57.4,68
"Net+5V Pi_1" on Signal "NET+5V_PI_1_L01_P039" (solid, remove dead copper, pour order 39): -73,76 -72.6,75.6 -57.2,75.6 -56.6,76.2 -56.6,79.9 -54.9,81.6 -53.2,81.6 -52,83 -52,84.7 -52.4,85.1 -60.2,85.1 -60.4,84.9 -60.4,81.1 -61.6,79.9 -72.5,79.9 -73,79.4
GND on Signal "GND_L01_P038" (solid, remove dead copper, pour order 38): -20.7,56.3 -21.2,55.8 -23.3,55.8 -25.3,53.8 -30.6,53.8 -31.1,53.3 -31.1,51.6 -31,51.5 -18.3,51.5 -17.6,52.2 -17.6,56 -17.9,56.3
GND on Signal "GND_L01_P037" (solid, remove dead copper, pour order 37): -77,12.7 -77.3,12.4 -78.7,12.4 -79.1,12.8 -79.1,19.8 -78.2,20.7 -75.2,20.7 -74.6,20.1 -74.6,17.6 -75.3,16.9 -76.6,16.9 -77,16.5
Net+3V3_1 on Signal "NET+3V3_1_L01_P022" (solid, pour order 22): -20.8,56.6 -21,56.8 -21,58.9 -22.8,60.7 -28.6,60.7 -30.1,62.2 -30.1,65.9 -29.1,66.8 -19.875,66.8 -17.5,64.086 -17.5,57.8 -18.1,56.6
GND on GND "GND_L02_P034" (solid, pour order 34): -92.46,1 cw(c-92.46,3.54) -95,3.54 -95,86.46 cw(c-92.46,86.46) -92.46,89 -3.54,89 cw(c-3.54,86.46) -1,86.46 -1,3.54 cw(c-3.54,3.54) -3.54,1 -4.5,1

## Silkscreen, mask and mechanical layers (free items; w line width, h text height)
Top Overlay:
  lines w0.254: -81.1,1.85 -81.1,3.35 ; -81.1,2.6 -81.85,2.6 -80.45,2.6
  text "Noah Grant ESE W23" at -3.8,44 h2 r90
Mechanical 1:
  lines w0.254: -96,3 ccw(c-93,3) -93,0 -3,0 ccw(c-3,3) 0,3 0,87 ccw(c-3,87) -3,90 -93,90 ccw(c-93,87) -96,87 -96,3
  lines w1.2: -96,3 ccw(c-93,3) -93,0 ; -96,3 ccw(c-93,3) -93,0 ; -96,3 -96,87 ; -96,3 -96,87 ; -96,87 cw(c-93,87) -93,90 ; -96,87 cw(c-93,87) -93,90 ; -93,0 -3,0 ; -93,0 -3,0 ; -93,90 -3,90 ; -93,90 -3,90 ; -3,0 ccw(c-3,3) 0,3 ; -3,0 ccw(c-3,3) 0,3 ; -3,90 cw(c-3,87) 0,87 ; -3,90 cw(c-3,87) 0,87 ; 0,3 0,87 ; 0,3 0,87